# Altium PCB 400926.PcbDoc (part 6 of 7)
Units mm, origin at the board's own origin, x right, y up, seen from the top; angles counter-clockwise.
Board outline 148.5 x 63.5 mm, 4 copper layers (Top Layer, Mid-Layer 1, Mid-Layer 2, Bottom Layer), stack 1.514 mm thick; 311 components, 281 nets, 1495 pads, 2232 vias.
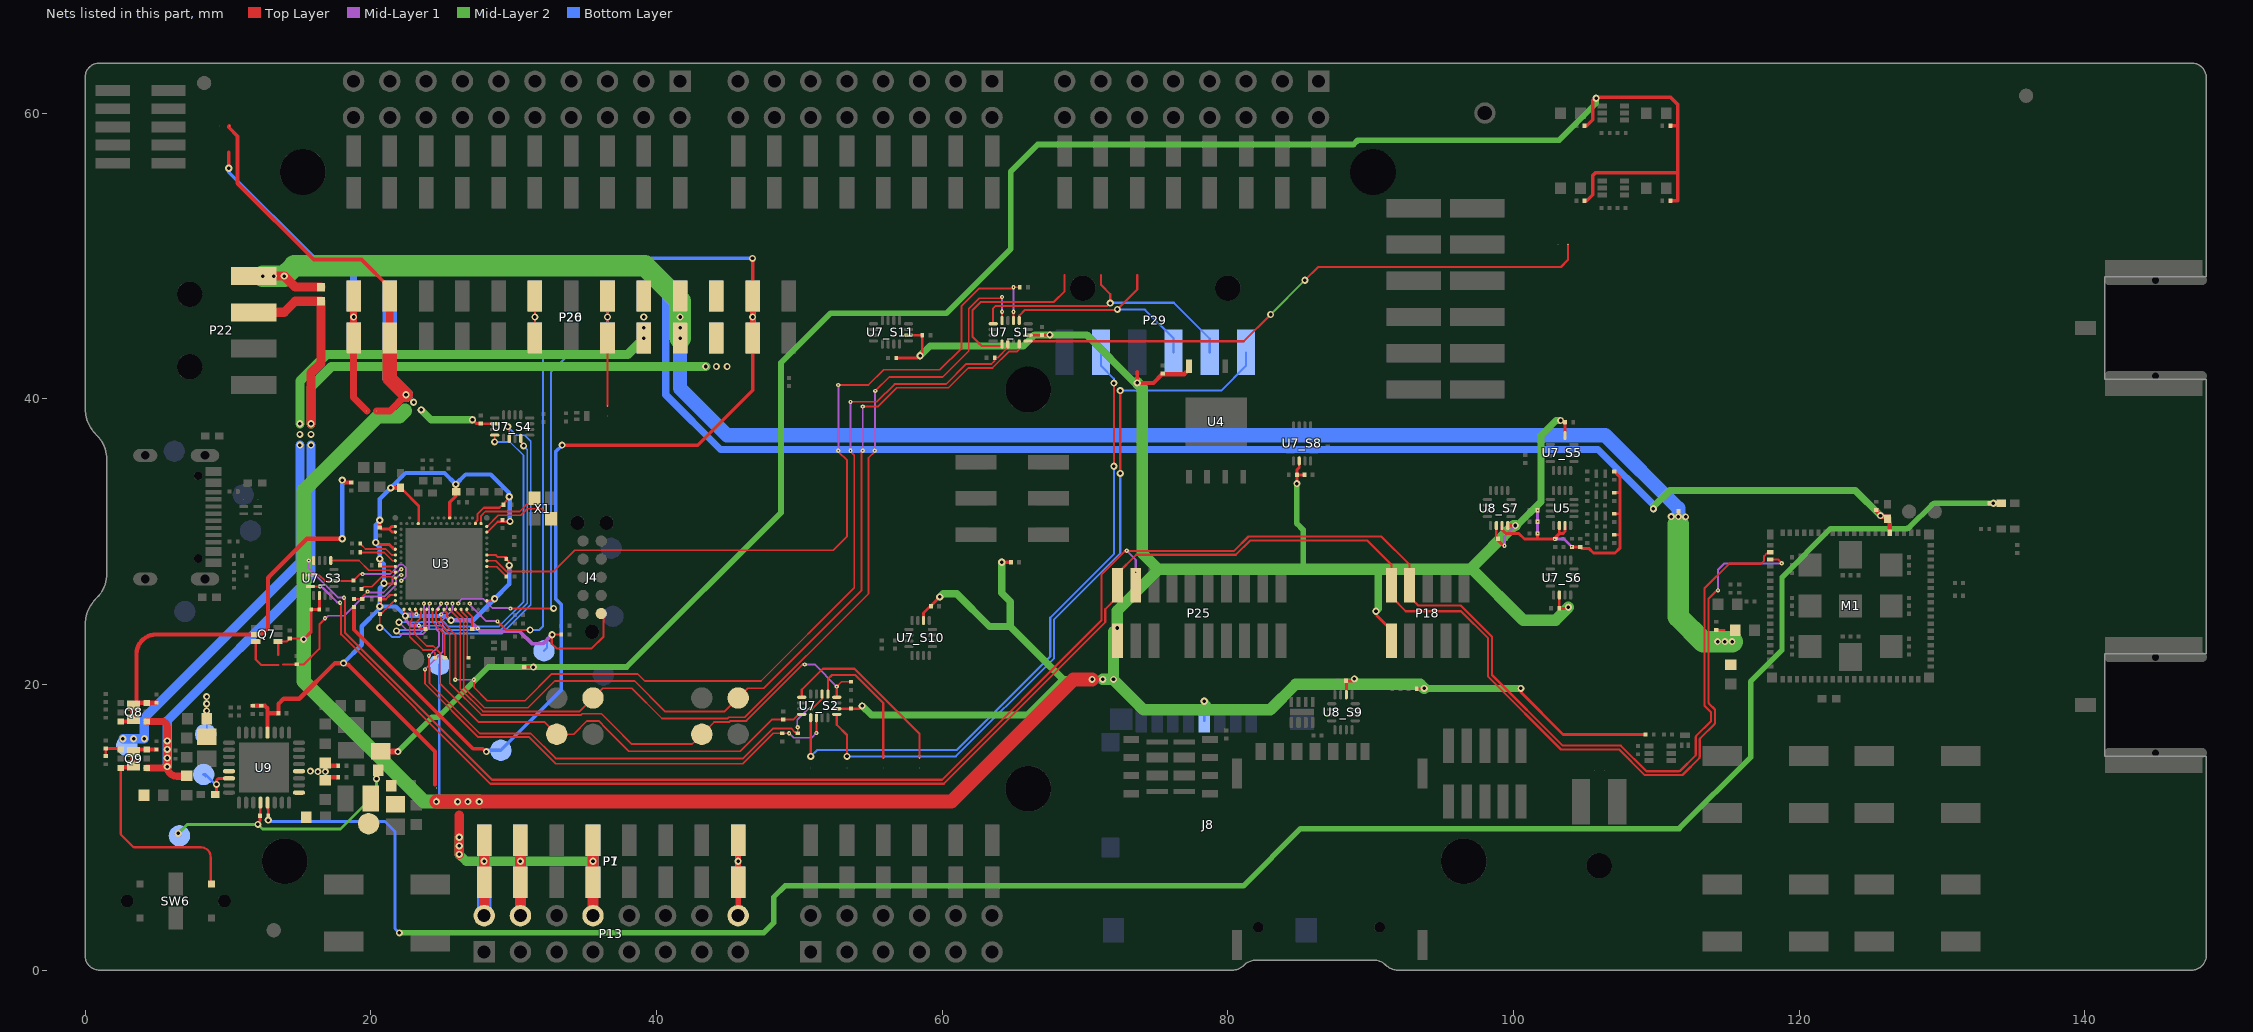
[diagram p7: the nets of this part, all layers, seen from the top]

## Via types
v1: diameter 0.5, hole 0.25, Top Layer to Bottom Layer, tented both sides, 1704 vias
v2: diameter 0.3, hole 0.1, Top Layer to Mid-Layer 1, tented top, 426 vias
v3: diameter 0.3, hole 0.1, Top Layer to Mid-Layer 1, tented both sides, 93 vias
v4: diameter 0.61, hole 0.305, Top Layer to Bottom Layer, tented both sides, 9 vias

## Nets (pads, with @x,y where several pads share a name; then routed paths per layer and width w, separated by ;. In a path a pad name is that pad's centre, name@x,y a point inside that pad or via, vN(x,y) a via of type N, cw(c..) or ccw(c..) an arc to the next point about the centre after c; other vN are vias at no path point) (continued)
SWD1_SEL: P20.8 P26.8 SB17.2 U3.AK22 | length 39.5
  Top Layer w0.15: v2(29.777,25.31) 32.786,25.31 v1(32.8,25.324) ; SB17.2@36.576,39.485 SB17.2@36.576,39.497 P20.8@36.576,44.255 v1(36.576,45.72) P20.8@36.576,47.185
  Mid-Layer 1 w0.125: v2(26.125,25.658) 26.125,25.705 26.187,25.768 26.187,25.798 26.385,25.995 27.865,25.995 28.513,25.347 29.616,25.347
  Bottom Layer w0.15: v1(32.8,25.324) 32.612,25.511 32.612,41.858 33.715,42.96 35.866,42.96 36.576,43.67 P26.8@36.576,44.255 v1(36.576,45.72) P26.8@36.576,47.185
SWD1_SWO: P20.6 P26.6 U3.AK26 | length 32.8
  Top Layer w0.15: v2(28.875,24.409) 29.476,23.808 v1@31,23.808 ; P20.6@31.496,43.612 v1(31.496,45.72) P20.6@31.496,47.185
  Mid-Layer 1 w0.125: v2(26.925,25.658) 26.925,25.581 28.06,24.446 28.715,24.446 28.718,24.442 28.842,24.442 v2(28.875,24.409)
  Bottom Layer w0.15: v1(31.159,23.808) 31.795,23.808 32.062,24.075 32.062,43.103 31.496,43.67 P26.6@31.496,44.255 v1(31.496,45.72) P26.6@31.496,47.185
SWD3_CLK: R20.1 U3.R1 | length 2.7
  Top Layer w0.125: R20.1@19.26,29.258 19.26,29.243 19.27,29.233 20.946,29.233 21.521,28.658 U3.R1@21.725,28.658
SWD3_IO: R19.1 U3.N1 | length 2.8
  Top Layer w0.125: R19.1@19.26,29.858 19.26,29.843 19.333,29.77 19.348,29.77 19.635,29.483 21.05,29.483 21.475,29.058 U3.N1@21.725,29.058
SWD3_RESET: R22.1 U3.AA1 | length 2.8
  Top Layer w0.125: R22.1@19.36,26.683 19.514,26.836 20.056,26.836 20.758,27.539 21.444,27.539 21.525,27.458 U3.AA1@21.725,27.458
SWD3_SWO: U3.W1 U7_S3.5 | length 4.9
  Top Layer w0.125: U7_S3.5@17.2,28.674 19.174,28.674 19.852,27.996 21.341,27.996 21.479,27.858 U3.W1@21.725,27.858
SWD_CTRL: R24.2 U3.AB2 U7_S3.2 U7_S3.10 | length 8.5
  Top Layer w0.125: U7_S3.10@15.775,27.649 16.4,27.649 16.8,27.249 U7_S3.2@17.425,27.249 18.765,27.249 19.24,27.724 v2(19.425,27.724)
  Mid-Layer 1 w0.125: v2(19.425,27.724) 21.349,27.724 21.996,28.37 22.254,28.37 22.45,28.175 22.45,27.541 22.167,27.258 v2(22.125,27.258)
SWDCLK: M1.3 P18.4 P25.4 U7_S3.8 | length 144.5
  Top Layer w0.15: v2(15.65,28.674) U7_S3.8@16,28.674 ; v2(18.125,26.074) 18.154,26.045 18.154,25.915 18.2,25.869 18.2,23.614 28.49,13.324 60,13.324 71.15,24.474 71.15,27.677 72.792,29.319 72.898,29.319 v2(72.927,29.347) 80.446,29.347 81.45,30.352 90.752,30.352 92.73,28.374 P18.4@92.73,26.949 92.73,26.129 93.335,25.524 96.317,25.524 98.5,23.341 98.5,20.661 103.447,15.714 107.524,15.714 109.314,13.924 111.588,13.924 ccw(c111.588,14.074) 111.694,13.968 112.721,14.995 ccw(c112.615,15.101) 112.765,15.101 112.765,16.302 cw(c112.915,16.302) 112.809,16.407 113.797,17.396 ccw(c113.69,17.502) 113.84,17.502 113.84,17.971 ccw(c113.69,17.971) 113.797,18.077 113.419,18.455 cw(c113.525,18.561) 113.375,18.561 113.375,26.725 115.099,28.449 117.333,28.449 117.55,28.667 117.55,28.819 117.55,28.982 117.742,29.174 117.9,29.174 M1.3@117.975,29.249
  Mid-Layer 1 w0.15: v2(15.65,28.674) 15.65,28.144 17.72,26.074 v2(18.125,26.074) ; v2(72.927,29.347) 73.555,28.719 v2(73.555,27.849)
SWDIO: M1.4 P18.2 P25.2 U7_S3.12 | length 142.7
  Top Layer w0.15: U7_S3.12@15.775,26.849 v2@16.375,26.849 ; v2(16.45,26.849) v2@16.375,26.849 ; v2@16.45,26.924 v2@16.375,26.849 ; v2(17.85,25.724) 17.85,25.683 17.925,25.608 17.925,23.501 28.377,13.049 60.114,13.049 71.425,24.36 71.425,25.269 72.285,26.129 P25.2@72.285,26.949 72.285,27.769 73.588,29.072 80.559,29.072 81.564,30.077 89.757,30.077 91.46,28.374 P18.2@91.46,26.949 91.46,26.129 92.465,25.124 96.328,25.124 98.225,23.227 98.225,20.547 103.333,15.439 107.41,15.439 109.2,13.649 111.763,13.649 ccw(c111.763,13.799) 111.869,13.693 112.996,14.82 ccw(c112.89,14.926) 113.04,14.926 113.04,14.994 113.04,16.127 cw(c113.19,16.127) 113.084,16.232 114.072,17.221 ccw(c113.965,17.327) 114.115,17.327 114.115,18.171 ccw(c113.965,18.171) 114.072,18.277 ; 114.072,18.277 113.694,18.655 cw(c113.8,18.761) 113.65,18.761 113.65,25.982 114.217,26.549 114.292,26.549 v3(114.321,26.578) ; M1.4@117.975,28.749 118.528,28.749 v3(118.786,28.49)
  Mid-Layer 1 w0.15: v2(16.45,26.849) 16.556,26.849 17.656,25.749 17.825,25.749 v2(17.85,25.724) ; v3(114.321,26.578) 114.321,28.02 114.763,28.462 118.758,28.462 v3(118.786,28.49)
TGT_SCL: U3.AK12 U7_S4.4 | length 26.2
  Top Layer w0.125: U7_S4.4@30.5,37.224 30.5,36.983 30.7,36.783 v1(30.7,36.699)
  Mid-Layer 1 w0.125: v1(21.8,23.749) 22.012,23.536 23.665,23.536 24.075,23.946 24.075,25.608 v2(24.125,25.658)
  Bottom Layer w0.125: v1(21.8,23.749) 21.857,23.806 23.311,23.806 23.617,24.111 25.034,24.111 25.34,23.806 29.078,23.806 30.95,25.678 30.95,36.438 30.7,36.688 v1(30.7,36.699)
TGT_SDA: U3.AK10 U7_S4.16 | length 26.5
  Top Layer w0.125: v1(28.675,36.974) U7_S4.16@28.675,37.449
  Mid-Layer 1 w0.125: v1(21.975,24.349) 22.537,23.786 23.541,23.786 23.725,23.97 v2(23.725,25.658)
  Bottom Layer w0.125: v1(21.975,24.349) 23.501,24.349 23.514,24.361 25.138,24.361 25.444,24.056 28.974,24.056 30.7,25.781 30.7,36.024 29.75,36.974 v1(28.675,36.974)
TGT_TWI_CTRL: R31.1 U3.AJ1 U7_S4.2 | length 28.8
  Top Layer w0.125: v1(20.625,23.974) 20.635,23.984 20.635,24.849 21.062,25.277 21.643,25.858 U3.AJ1@21.725,25.858 ; v1(29.6,38.049) 29.7,37.949 U7_S4.2@29.7,37.224
  Bottom Layer w0.125: v1(20.625,23.974) 20.836,23.974 21.498,23.311 21.981,23.311 22.225,23.556 23.415,23.556 23.721,23.861 24.931,23.861 25.237,23.556 29.182,23.556 31.2,25.574 31.2,37.024 30.775,37.449 30.2,37.449 v1(29.6,38.049)
UART1.CTS: P29.6 SB6.2 U7_S2.13 | length 51.7
  Top Layer w0.15: U7_S2.13@52.625,17.899 52.625,17.169 53.34,16.454 v1(53.34,14.961) ; v1(72.475,34.774) v1(72.475,40.565)
  Bottom Layer w0.15: v1(53.34,14.961) 60.967,14.961 67.842,21.836 67.842,24.553 72.475,29.185 v1(72.475,34.774) ; v1(72.475,40.565) 79.541,40.565 81.28,42.304 P29.6@81.28,43.249
UART1.RTS: P29.2 SB5.2 U7_S2.9 | length 46.2
  Top Layer w0.15: SB5.2@50.8,14.837 SB5.2@50.8,14.849 v1(50.8,14.961) U7_S2.9@50.8,17.674 U7_S2.9@50.8,17.874 ; v1(72.025,35.274) v1(72.025,41.099)
  Bottom Layer w0.15: v1(50.8,14.961) 51.25,15.411 61.028,15.411 67.567,21.95 67.567,24.666 72.025,29.124 v1(72.025,35.274) ; P29.2@71.12,43.249 71.12,42.304 72.025,41.399 v1(72.025,41.099)
UART1.RXD: P29.4 SB3.2 U7_S1.1 | length 16.1
  Top Layer w0.15: U7_S1.1@65.4,45.474 65.4,45.817 65.807,46.224 72.24,46.224 v1(72.268,46.252) 73.66,47.644 SB3.2@73.66,48.649 SB3.2@73.66,48.661
  Bottom Layer w0.15: v1(72.268,46.252) 74.172,46.252 74.221,46.203
  Bottom Layer w0.152: 74.221,46.203 76.2,44.224 P29.4@76.2,43.249
UART1.TXD: P29.5 SB4.2 U7_S1.5 | length 20.6
  Top Layer w0.15: U7_S1.5@63.575,45.249 63.575,46.324 63.75,46.499 71.575,46.499 v1(71.775,46.699) 71.775,47.324 71.12,47.979 SB4.2@71.12,48.661
  Bottom Layer w0.15: v1(71.775,46.699) 71.8,46.724 76.225,46.724 78.74,44.209 P29.5@78.74,43.249
UART2.CTS: SB10.2 U7_S2.5 | length 13
  Top Layer w0.15: U7_S2.5@50.175,19.099 50.175,19.622 51.652,21.099 53.864,21.099 58.42,16.543 SB10.2@58.42,14.849 SB10.2@58.42,14.837
UART2.RTS: SB9.2 U7_S2.1 | length 9.7
  Top Layer w0.15: U7_S2.1@52,19.324 52,20.374 52.287,20.661 53.912,20.661 55.88,18.694 SB9.2@55.88,14.849 SB9.2@55.88,14.837
UART2.RXD: SB7.2 U7_S1.9 | length 12.4
  Top Layer w0.15: U7_S1.9@64.2,43.824 64.2,43.739 64.162,43.701 62.755,43.701 62.55,43.906 62.55,43.913 62.125,44.338 62.125,46.193 62.706,46.774 67.825,46.774 68.58,47.529 SB7.2@68.58,48.649 SB7.2@68.58,48.661
UART2.TXD: SB8.2 U7_S1.13 | length 41.2
  Top Layer w0.15: U7_S1.13@66.025,44.049 66.05,44.024 81.125,44.024 v1(83,45.899) ; v1(85.4,48.299) 86.325,49.224 103.325,49.224 103.81,49.709 SB8.2@103.81,50.8
  Mid-Layer 2 w0.15: v1(83,45.899) v1(85.4,48.299)
USB_DETECT: Q7.3 R74.2 SB29.2 U3.Y2 | length 15.1
  Top Layer w0.15: Q7.3@11.95,22.999 11.95,21.749 12.35,21.349 SB29.2@13.525,21.349 ; 13.878,21.387 R74.2@14.825,21.387 ; R74.2@14.825,21.414 14.84,21.399 15.3,21.399 16.4,22.499 16.4,24.199 16.796,24.595 v2(16.796,24.636)
  Mid-Layer 1 w0.125: v2(16.796,24.636) 16.837,24.636 17.012,24.811 18.157,24.811 19.507,26.161 20.972,26.161 21.775,26.965 21.775,27.432 22.001,27.658 v2(22.125,27.658)
VBUS: Q7.2 Q8.3 Q8.6 R21.1 R78.2 | length 32
  Top Layer w0.3: Q8.3@2.495,17.399 3.225,17.399 ccw(c3.225,17.574) Q8.3@3.4,17.574 ; Q8.6@3.4,18.524 3.59,18.714 Q8.6@4.305,18.714 ; Q8.6@3.6,18.524 3.6,22.132 cw(c4.967,22.132) 4.967,23.499 Q7.2@11.95,23.499 11.975,23.524 12.364,23.524 12.8,23.96 12.8,27.332 cw(c13.1,27.332) 12.888,27.544 15.542,30.199 v1(18,30.199) ; Q8.6@4.305,18.699 Q8.6@4.305,18.714 ; R78.2@5,18.714 Q8.6@4.305,18.714 ; v1(18,34.299) 18.165,34.134 R21.1@18.625,34.134
  Top Layer w0.5: Q8.3@3.4,17.574 Q8.6@3.4,18.524
  Bottom Layer w0.3: v1(18,30.199) v1(18,34.299)
VBUSOUT: C64.2 TP25.1 U9.22 | length 3.3
  Top Layer w0.2: C64.2@9.1,12.299 ccw(c9.1,12.399) 9.2,12.399 v1(9.2,12.999) 9.2,13.199 cw(c9.425,13.199) 9.425,13.424 U9.22@10.075,13.424
  Bottom Layer w0.15: TP25.1@8.3,13.699 TP25.1@8.425,13.574
  Bottom Layer w0.2: TP25.1@8.3,13.699 8.419,13.699 9.119,12.999 v1(9.2,12.999)
VCOM0_CTRL: R13.1 U3.R31 U7_S1.2 | length 57
  Top Layer w0.125: U3.R31@28.125,28.658 28.754,28.658 29.516,27.895 32.771,27.895 34.275,29.399 52.375,29.399 53.35,30.374 53.35,35.684 52.737,36.297 v2(52.737,36.349) ; v2(52.737,40.961) 54.841,40.961 55.904,42.024 59.839,42.024 61.362,43.547 61.362,46.508 62.566,47.711 64.912,47.711 v2(65,47.799) R13.1@65.44,47.799 ; U7_S1.2@65,45.474 v2(65,46.099)
  Mid-Layer 1 w0.125: v2(52.737,36.349) v2(52.737,40.961) ; v2(65,46.099) v2(65,47.799)
VCOM0_CTS: R86.1 TP5.1 U3.AL9 U7_S2.8 | length 35.9
  Top Layer w0.125: U3.AL9@23.525,25.258 23.525,24.716 23.062,24.253 23.062,23.547 23.923,22.686 24.366,22.686 24.838,22.215 24.838,20.071 27.547,17.361 32.167,17.361 32.822,16.707 32.822,16.311 TP5.1@33.02,16.509 34.201,16.509 35.139,17.446 35.948,17.446 36.497,16.897 36.497,16.894 38.07,15.321 45.858,15.321 48.076,17.539 R86.1@48.875,17.539 49.59,17.539 49.95,17.899 U7_S2.8@50.175,17.899
VCOM0_HWFC: R18.2 U3.AK20 U7_S2.10 | length 38.4
  Top Layer w0.125: v2(23.8,21.049) 23.8,20.048 27.537,16.311 31.095,16.311 32.957,14.449 46.046,14.449 48.181,16.584 v2(49.285,16.584) ; v2(51.2,16.599) U7_S2.10@51.2,17.674
  Mid-Layer 1 w0.125: v2(23.8,21.049) 25.037,22.286 25.037,24.534 25.725,25.222 v2(25.725,25.658) ; v2(49.285,16.584) 49.607,16.261 50.862,16.261 v2(51.2,16.599)
VCOM0_RTS: R15.1 U3.AL5 | length 4.6
  Top Layer w0.125: U3.AL5@22.725,25.258 22.725,25.234 22.862,25.096 22.862,24.486 22.725,24.349 22.725,23.35 23.663,22.411 24.287,22.411 24.5,22.199 R15.1@24.5,21.868
VCOM0_RXD: TP4.1 U3.AL19 U7_S1.4 | length 69.7
  Top Layer w0.125: U3.AL19@25.525,25.216 25.542,25.216 26.262,24.496 26.262,20.464 26.262,20.184 26.262,19.707 27.858,18.111 34.622,18.111 TP4.1@35.56,19.049 36.247,19.736 38.262,19.736 40.387,17.611 44.991,17.611 45.076,17.696 46.194,17.696 54.85,26.353 54.85,35.859 55.287,36.297 v2(55.287,36.349) ; v2(55.325,40.549) 56.3,41.524 60.046,41.524 61.862,43.34 61.862,46.301 62.598,47.036 64.087,47.036 v2@64.175,47.124 ; U7_S1.4@64.2,45.474 v2(64.2,46.099)
  Top Layer w0.15: U3.AL19@25.525,25.216 U3.AL19@25.525,25.258
  Mid-Layer 1 w0.125: v2(55.287,36.349) 55.306,36.368 55.306,40.53 v2(55.325,40.549) ; v2@64.175,47.124 64.2,47.099 v2(64.2,46.099)
  other v2: 64.2,47.124
VCOM0_TXD: R11.1 U3.U31 | length 1.7
  Top Layer w0.125: U3.U31@28.125,28.258 28.144,28.239 28.819,28.239 R11.1@29.5,27.558
VCOM1_CTRL: R14.2 U3.AK18 U7_S1.10 | length 64.5
  Top Layer w0.125: v2@24.925,24.924 v2(24.925,24.899) 24.925,24.474 25.925,23.474 v2(25.925,20.324) ; v2(27.225,20.324) 27.225,19.805 28.169,18.861 30.8,18.861 32.675,20.736 38.677,20.736 39.177,20.236 47.32,20.236 53.85,26.767 53.85,36.034 53.587,36.297 v2(53.587,36.349) ; v2@53.587,39.749 53.625,39.786 55.437,39.786 56.675,41.024 60.275,41.024 61.687,42.436 63.459,42.436 63.661,42.638 63.661,42.85 R14.2@63.685,42.874 63.886,42.874 64.6,43.588 U7_S1.10@64.6,43.824
  Mid-Layer 1 w0.125: v2@24.925,24.924 25.325,25.324 v2(25.325,25.658) ; v2(25.925,20.324) v2(27.225,20.324) ; v2(53.587,36.349) v2(53.587,39.774)
VCOM1_CTS: R85.1 TP9.1 U3.AL15 U7_S2.16 | length 39.4
  Top Layer w0.125: U3.AL15@24.725,25.258 24.725,25.234 24.575,25.084 24.575,24.47 25.537,23.508 25.537,20.078 27.754,17.861 34.726,17.861 34.811,17.946 36.152,17.946 36.155,17.946 36.997,17.104 36.997,17.101 38.277,15.821 42.492,15.821 TP9.1@43.18,16.509 44.032,17.361 45.095,17.361 45.18,17.446 46.297,17.446 50.25,21.399 v2(50.375,21.399) ; v2(52.625,19.849) 52.96,20.184 R85.1@53.625,20.184
  Top Layer w0.15: U7_S2.16@52.625,19.099 v2(52.625,19.849)
  Mid-Layer 1 w0.125: v2(50.375,21.399) 51.075,21.399 v2(52.625,19.849)
VCOM1_HWFC: R17.1 U3.AK16 U7_S2.2 | length 38.7
  Top Layer w0.125: v2(24.075,22.003) 24.075,21.216 24.112,21.178 24.112,20.089 27.64,16.561 31.198,16.561 32.938,14.821 46.065,14.821 48.165,16.921 49.425,16.921 49.69,16.656 49.827,16.656 R17.1@49.9,16.584 v2(49.9,16.999) ; v2(50.8,18.299) 50.9,18.299 51.6,18.999 U7_S2.2@51.6,19.324
  Mid-Layer 1 w0.125: v2(24.075,22.003) 24.787,22.715 24.787,23.657 24.587,23.857 24.587,25.236 24.853,25.502 24.853,25.539 24.925,25.611 v2(24.925,25.658) ; v2(49.9,16.999) 49.862,17.036 49.862,17.539 50.623,18.299 v2(50.8,18.299)
VCOM1_RTS: R16.1 U3.AL13 | length 3.7
  Top Layer w0.125: U3.AL13@24.325,25.258 24.325,24.367 25.175,23.517 R16.1@25.175,21.868
VCOM1_RXD: TP8.1 U3.AL21 U7_S1.12 | length 65.2
  Top Layer w0.125: U3.AL21@25.925,25.234 25.925,25.187 25.976,25.137 ; 25.976,25.136 26.512,24.599 26.512,20.567 26.512,20.081 26.512,19.81 27.961,18.361 31.007,18.361 32.882,20.236 38.47,20.236 40.595,18.111 44.782,18.111 TP8.1@45.72,19.049 46.407,19.736 47.527,19.736 54.35,26.56 54.35,36.261 v2(54.437,36.349) ; v2(54.437,39.449) 55.5,39.449 56.825,40.774 60.45,40.774 61.825,42.149 63.525,42.149 64.687,43.311 65.257,43.311 65.4,43.454 U7_S1.12@65.4,43.824
  Mid-Layer 1 w0.125: v2(54.437,36.349) v2(54.437,39.449)
VCOM1_TXD: R12.1 U3.AL23 | length 3.6
  Top Layer w0.125: U3.AL23@26.325,25.258 26.344,25.239 26.344,25.121 26.762,24.703 26.762,21.931 R12.1@26.825,21.868
VDD: C42.2 C52_S1.1 C52_S2.1 C52_S3.1 C52_S4.1 C52_S5.1 C52_S6.1 C52_S8.1 C52_S10.1 C52_S11.1 C53_S7.1 C53_S9.1 J8.4 P18.1 P20.2 P25.1 P26.2 Q7.4 R8.1 R23.2 R35.2 R62.1 R66.1 R69.2 R75.1 SB16.2 SB20.1 SB29.1 SB30.2 SB31.1 SB32.1 SB33.2 TP23.1 U4.8 U7_S1.14 U7_S2.14 U7_S3.14 U7_S4.14 U7_S5.14 U7_S6.14 U7_S8.14 U7_S10.14 U7_S11.14 U8_S7.14 U8_S7.16 U8_S9.14 | length 344.9
  Top Layer w0.15: SB29.1@13.525,22.049 13.525,22.974 Q7.4@13.5,22.999 14.11,22.999 R75.1@14.325,23.214 15.235,23.214 v1(15.3,23.149)
  Top Layer w0.2: v1(15.3,23.149) 15.835,23.684 C52_S3.1@15.835,25.249 16.335,25.249 16.4,25.314 U7_S3.14@16.4,26.224 ; v1(27.125,38.524) 27.385,38.264 C52_S4.1@27.7,38.264 27.715,38.249 U7_S4.14@28.675,38.249 ; U7_S2.14@52.625,18.299 54.2,18.299 v1(54.4,18.499) ; R66.1@56.785,42.849 58.3,42.849 v1(58.457,43.006) 58.615,43.164 C52_S11.1@58.615,44.449 U7_S11.14@57.643,44.449 ; U7_S10.14@58.7,24.474 58.7,24.992 v1(59.832,26.124) ; U7_S1.14@66.025,44.449 66.985,44.449 C52_S1.1@67,44.464 67.54,44.464 v1(67.55,44.474) ; v1(84.838,34.061) C52_S8.1@84.838,34.67 ; U7_S8.14@85,35.649 85,35.192 84.838,35.03 C52_S8.1@84.838,34.67 ; R35.2@85.368,34.67 C52_S8.1@84.838,34.67 ; U8_S9.14@88.3,19.274 88.3,20.234 v1@88.86,20.234 ; v1(90.375,25.124) 90.432,25.067 90.432,24.817 91.46,23.789 P18.1@91.46,23.049 ; R62.1@93.235,19.699 v1@93.752,19.699 ; U8_S7.14@98.8,31.124 98.8,30.224 99.325,29.699 v2(99.375,29.699) v2@99.4,29.699 ; v1(100.525,19.717) 100.525,19.449 103.475,16.499 R8.1@109.255,16.499 ; U7_S6.14@103.21,26.258 103.208,26.256 C52_S6.1@103.208,25.333 103.217,25.324 103.775,25.324 v1(103.85,25.399)
  Top Layer w0.22: v1(103.3,38.474) 103.376,38.474 103.452,38.398 103.588,38.398 103.61,38.376 U7_S5.14@103.61,37.433
  Top Layer w0.25: v1(73.66,41.109) SB20.1@73.66,41.854 73.66,41.892
  Top Layer w0.254: SB16.2@10.1,59.094 10.062,59.056 10.062,58.999 10.675,58.386 10.675,55.074 16,49.749 19.35,49.749 21.336,47.763 P20.2@21.336,46.948 ; v1(64.176,28.549) R69.2@64.815,28.549 ; U8_S7.16@99.6,31.124 v1(100.137,31.124)
  Top Layer w0.3: v1(73.66,41.109) 74.795,41.109 75.41,41.724 76.95,41.724 77.282,42.056 U4.8@77.282,42.269
  Top Layer w0.5: 20.404,39.147 21.337,39.147 v1(22.47,40.279)
  Top Layer w0.508: P20.2@21.336,44.255 P20.2@21.336,46.948
  Top Layer w1: P20.2@21.336,44.255 21.336,41.413 v1(22.47,40.279) ; v1@24.6,11.799 25.3,11.799 26.078,11.799 60.65,11.799 69.2,20.349 v1(70.5,20.349)
  Mid-Layer 1 w0.2: v2(99.375,29.699) 99.375,30.362 v1(100.137,31.124)
  Mid-Layer 2 w0.4: v1(84.838,34.061) 84.838,31.264 85.282,30.82 85.282,28.049
  Mid-Layer 2 w0.5: v1(23.53,39.219) 24.225,38.524 v1(27.125,38.524) ; v1(54.4,18.499) 55.05,17.849 65.975,17.849 68.475,20.349 ; v1(58.457,43.006) 59.15,43.699 65.7,43.699 66.475,44.474 v1(67.55,44.474) 70.125,44.474 73.49,41.109 v1(73.66,41.109) ; v1(59.832,26.124) 60.057,26.349 61.025,26.349 63.325,24.049 64.775,24.049 ; v1(64.176,28.549) 64.176,26.398 64.775,25.799 64.775,24.049 ; v1(70.5,20.349) 68.475,20.349 ; v1(78.35,18.824) 78.58,18.594 78.58,18.224 ; v1(88.86,20.384) 89.13,20.114 89.13,19.999 ; v1(90.375,25.124) 90.53,25.279 90.53,28.049 ; v1(93.752,19.717) v1(100.525,19.717) ; v1(100.137,31.124) 100.259,31.124 101.925,32.79 101.925,37.43 102.969,38.474 v1(103.3,38.474) ; 64.775,24.049 68.475,20.349
  Mid-Layer 2 w0.8: v1(71.25,20.349) 71.975,20.349 74.1,18.224 78.58,18.224 82.968,18.224 84.743,19.999 89.13,19.999 93.47,19.999 v1(93.752,19.717) ; v1(72,20.349) 72,23.674 v1(72.275,23.949) 72.275,25.169 75.155,28.049 ; v1(73.66,41.109) 74,40.769 74,29.204 75.155,28.049 ; v1(100.137,31.124) 100.025,31.124 96.95,28.049 ; v1(103.85,25.399) 102.95,24.499 100.693,24.499 97.143,28.049 96.95,28.049 ; 75.155,28.049 85.282,28.049 90.53,28.049 96.95,28.049
  Mid-Layer 2 w1: 22.4,39.149 22,38.749 20.5,38.749 15.3,33.549 15.3,20.227 23.728,11.799 v1(26.8,11.799) v1(27.6,11.799)
  Bottom Layer w0.2: v1(24.595,11.798) 24.595,11.864 24.795,12.065 TP23.1@24.795,21.379 ; J8.4@78.35,17.469 v1(78.35,18.824)
  Bottom Layer w1: P26.2@21.336,47.185 P26.2@21.336,44.255 21.336,41.413 v1(22.47,40.279)
  other v1: 26.078,11.784 23,39.749
VDD_1V8: C60.2 C69.2 FB5.1 L7.1 TP21.1 U9.1
VDD_3V0: C72.2 FB6.2 R33.2 R39.2 R40.2 R41.2 R42.2 R87.1 TP27.1 U9.28 | length 156.1
  Top Layer w0.2: v1(12.1,10.199) 12.1,10.28 12.257,10.437 12.257,10.749 12.252,10.754 R87.1@12.252,10.799 12.264,10.811 12.264,11.713 U9.28@12.275,11.724 ; R33.2@30.75,21.214 v1(31.39,21.214)
  Top Layer w0.25: R41.2@104.983,53.867 105.143,53.867 105.556,54.28 105.556,55.631 105.747,55.822 111.496,55.822 ; R39.2@104.983,59.117 105.143,59.117 105.556,59.53 105.556,60.881 ; v1(105.79,61.032) 105.856,61.099 111,61.099 111.499,60.6 111.499,53.867 R42.2@110.983,53.867 ; R40.2@110.983,59.117 111.499,59.117
  Top Layer w0.4: FB6.2@20.7,15.324 20.725,15.299 v1(21.9,15.299)
  Mid-Layer 2 w0.2: v1(6.525,9.574) 7.15,10.199 v1(12.1,10.199) 12.429,9.87 17.871,9.87 20.4,12.399 v1(20.4,13.399)
  Mid-Layer 2 w0.4: v1(21.9,15.299) 24.293,17.692 24.707,17.692 28.228,21.214 v1(31.39,21.214) 37.915,21.214 48.714,32.013 48.714,42.513 52.189,45.988 60.311,45.988 64.8,50.478 64.8,55.899 66.7,57.799 88.8,57.799 89.1,58.099 103.2,58.099 105.8,60.699 105.8,60.999 105.79,61.009 v1(105.79,61.032)
VDD_5V: C54.2 C58.2 P20.11 P22.2 P26.11 Q8.4 Q9.4 R82.2 SB34.2 SB35.1 U9.21 | length 79
  Top Layer w0.5: Q9.4@4.305,14.149 5.65,14.149 v1(5.75,14.249) ; Q8.4@4.305,17.399 5.4,17.399 cw(c5.4,17.049) 5.75,17.049 v1(5.75,16.049) v1(5.75,15.449) v1(5.75,14.849) v1(5.75,14.249) ; C54.2@7.127,13.596 cw(c7.105,13.596) 7.105,13.574 6.425,13.574 cw(c6.425,14.249) v1(5.75,14.249)
  Top Layer w0.65: P22.2@11.811,46.048 13.946,46.048 14.716,46.818 R82.2@16.51,46.818 16.51,42.49 15.819,41.799 v1(15.819,38.249)
  Mid-Layer 2 w0.65: v1(15.819,38.249) 15.819,40.818 17.256,42.255 v1(43.446,42.255)
  Bottom Layer w0.65: v1(5.75,14.249) v1(5.75,14.849) v1(5.75,15.449) v1(5.75,16.049) 5.75,17.449 15.819,27.518 v1(15.819,36.749)
  other v1: 15.819,37.499 44.196,42.255 44.946,42.255
VDD_GNSS: C11.2 L3.1 R87.2 U9.29 | length 148.8
  Top Layer w0.2: U9.29@12.775,11.724 12.775,11.422 12.794,11.403 12.794,11.282 12.827,11.249 12.827,10.849 12.822,10.845 12.828,10.838 v1(12.828,10.503)
  Mid-Layer 2 w0.381: v1@22.032,2.599 47.5,2.599 48.2,3.299 48.2,5.099 49,5.899 81.1,5.899 85.1,9.899 111.6,9.899 116.6,14.899 116.6,20.199 118.8,22.399 118.8,27.499 122.2,30.899 127.467,30.899 ccw(c127.467,31.28) 127.736,31.01 129.299,32.573 cw(c129.568,32.303) 129.568,32.684 v1(133.606,32.684)
  Bottom Layer w0.2: v1(12.828,10.503) 12.831,10.499 ccw(c13.004,10.599) 13.004,10.399 21,10.399 21.7,9.699 21.7,2.899 v1(22,2.599)
VDD_GPIO: C4.1 C5.1 M1.65 P20.1 P26.1 SB31.2 | length 135.5
  Top Layer w0.305: C4.1@125.4,32.184 125.602,31.982 125.602,31.969 125.7,31.871 v1(125.7,31.818) ; v1@125.691,31.799 125.753,31.799 125.805,31.747 126.202,31.747 126.3,31.649 126.3,31.399 126.35,31.349 M1.65@126.35,30.624
  Top Layer w0.5: 18.796,41.889 18.796,40.079 SB31.2@19.728,39.147
  Top Layer w0.508: 18.796,41.889 P20.1@18.796,44.255 P20.1@18.796,47.185
  Mid-Layer 2 w0.5: v1(109.8,32.299) 109.8,32.449 110.937,33.586 123.933,33.586 v1(125.7,31.818)
  Bottom Layer w0.5: P26.1@18.796,47.185 18.796,48.82 19.3,49.324 39.575,49.324 40.65,48.249 40.65,40.274 44.479,36.445 105.929,36.445 109.8,32.574 v1(109.8,32.299)
  Bottom Layer w0.508: P26.1@18.796,44.255 P26.1@18.796,47.185
  other v1: 18.796,45.72
VDD_IMCU: C24.2 C25.2 C26.1 C27.2 C28.1 C31.2 C32.2 C33.2 C34.1 C35.2 C62.1 J4.1 R34.2 R83.2 R84.2 SB32.2 TP12.1 U3.A19 U3.AC1 U3.AG1 U3.AJ31 U3.AL3 U3.AL7 U3.AL11 U3.AL17 U3.AL25 U3.B8 U3.B28 U3.C1 U3.E1 U3.E31 U3.L1 U3.N31 U3.U1 U9.12 | length 105.2
  Top Layer w0.15: v1@20.635,25.458 C26.1@20.635,25.958 ; C25.2@20.635,28.258 U3.U1@21.725,28.258 ; C25.2@20.635,28.333 v1@20.635,28.783 ; C26.1@20.65,25.958 21.05,25.958 21.35,26.258 U3.AG1@21.725,26.258 ; v1@20.925,27.058 U3.AC1@21.725,27.058 ; v1@22.325,24.793 U3.AL3@22.325,25.258 ; v2(23.2,24.921) U3.AL7@23.2,25.183 ; v2(23.375,24.124) 23.375,23.999 23.506,23.868 C27.2@23.827,23.868 23.837,23.879 23.837,25.15 23.925,25.238 U3.AL11@23.925,25.258 ; U3.AL17@25.125,25.216 25.34,25.001 25.34,24.778 v1(25.625,24.493) ; U3.AL25@26.725,25.258 26.725,25.112 27.1,24.737 C31.2@27.1,23.868 27.125,23.893 27.475,23.893 v2(27.5,23.918) ; U3.B28@27.325,31.258 27.325,31.333 27.462,31.47 27.462,31.915 27.918,32.37 29.012,32.37 29.141,32.499 29.23,32.499 29.261,32.53 29.261,32.619 29.7,33.058 v1(29.7,33.133) ; U3.AJ31@28.125,25.858 28.443,25.858 ; U3.N31@28.125,29.058 28.75,29.058 28.9,28.908 C32.2@29.49,28.908 ; U3.E31@28.125,30.658 28.167,30.658 28.892,31.383 v1@29.75,31.383 ; C32.2@29.427,28.845 29.634,28.639 29.634,28.399 v1(29.7,28.333) ; R34.2@33.34,23.499 32.725,23.499 v1(32.7,23.474) 32.675,23.449 32.675,22.849 33,22.524 35.467,22.524 36.3,23.357 36.3,24.794 J4.1@36.135,24.959
  Top Layer w0.187: C35.2@22.175,33.838 22.175,33.666 23.368,32.473 23.368,31.301 U3.B8@23.325,31.258
  Top Layer w0.2: v1(20.35,29.933) 20.5,29.783 21.323,29.783 21.648,29.458 U3.L1@21.725,29.458 ; C24.2@20.625,30.993 20.644,30.958 ccw(c20.809,31.07) 20.809,30.87 21.287,30.87 ; U3.E1@21.725,30.658 21.72,30.663 21.495,30.663 21.287,30.87 ; U3.C1@21.725,31.058 21.475,31.058 21.287,30.87
  Top Layer w0.225: U3.A19@25.525,31.658 25.525,32.753 25.95,33.178 v1(25.95,34.008)
  Top Layer w0.25: C24.2@20.625,30.993 20.619,30.999 20.619,31.491 v1(20.625,31.496)
  Top Layer w0.3: R84.2@11.737,18.501 11.739,18.499 12.599,18.499 12.775,18.323 12.775,17.999 ; U9.12@12.775,16.624 12.775,17.999 ; v1(18.091,21.49) 18.145,21.49 18.245,21.39 18.415,21.39 24.5,15.304 24.5,12.999 ; v1@18.109,21.49 17.491,21.49 15,18.999 13.9,18.999 13.54,18.639 C62.1@13.54,17.974 12.8,17.974 12.775,17.999 ; v1(21.4,33.758) C35.2@22.025,33.758
  Mid-Layer 1 w0.25: v1(22.423,24.793) 22.475,24.741 22.475,24.466 22.817,24.124 v2(23.375,24.124) ; v1@22.527,24.921 v2(23.2,24.921) ; v1(25.625,24.493) 26.925,24.493 v2(27.5,23.918) 27.71,23.708 30.441,23.708 31.291,22.858 32.084,22.858 v1(32.7,23.474)
  Bottom Layer w0.15: TP12.1@32.129,22.352 32.343,22.566 32.343,23.217 32.533,23.407 32.633,23.407 v1(32.7,23.474)
  Bottom Layer w0.3: v1(18.091,21.49) 19.375,22.774 19.375,24.066 20.587,25.278 20.587,25.366 v1@20.625,25.366 ; v1(29.7,28.333) 29.7,27.02 v1(28.675,25.995) 27.173,24.493 v1(25.625,24.493) 25.571,24.493 25.271,24.793 v1(22.423,24.793) 21.758,25.458 v1(20.625,25.458) 20.625,26.733 20.925,27.033 v1(20.925,27.087) 20.925,28.429 20.625,28.729 v1(20.625,28.783) 20.625,29.604 20.35,29.879 v1(20.35,29.933) 20.35,31.167 20.625,31.442 v1(20.625,31.496) 20.625,32.983 v1(21.4,33.758) 22.441,34.799 25.159,34.799 v1(25.95,34.008) 26.641,34.699 28.4,34.699 29.662,33.437 29.662,33.171 v1(29.7,33.133) 29.725,33.108 29.725,31.433 v1(29.75,31.408)
VDD_nRF: C1.1 C2.1 C3.1 FB1.1 P20.10 P22.1 P26.10 R82.1 SB34.1 | length 127.1
  Top Layer w0.125: C1.1@114.19,23.814 114.8,23.814
  Top Layer w0.65: P22.1@11.811,48.588 v1(12.446,48.588) v1(13.196,48.588) v1(13.946,48.588) 14.716,47.818 R82.1@16.51,47.818
  Mid-Layer 2 w1.5: v1(12.446,48.588) v1(13.196,48.588) v1(13.946,48.588) 14.657,49.299 39.2,49.299 41.656,46.843 v1(41.656,45.72) v1(41.656,44.97) v1(41.656,44.22) ; 111.55,31.225 111.55,24.724 113.28,22.994 v1(114.298,22.994) ; v1@114.298,22.991 115.301,22.991 v1(115.305,22.995)
  Bottom Layer w1: P26.10@41.656,44.255 v1(41.656,44.22) 41.656,40.741 44.948,37.449 106.425,37.449 111.55,32.324 v1@111.55,31.849
  other v1: 114.8,22.999 112.053,31.728 111.048,31.744 111.55,31.749
VIN: P1.8 P7.8 P13.16 | length 8.2
  Top Layer w0.381: P13.16@45.72,3.81 P1.8@45.72,6.155 v1(45.72,7.62) P1.8@45.72,9.085
  Bottom Layer w0.381: P7.8@45.72,6.155 v1(45.72,7.62) P7.8@45.72,9.085
VIN:5V: P20.9 P26.9 Q9.1 R79.2 R80.1 TP22.1 | length 56.5
  Top Layer w0.2: R79.2@1.45,14.984 R80.1@1.45,15.514 2.43,15.514 Q9.1@2.495,15.449
  Mid-Layer 2 w0.65: v1(15.044,38.249) 15.044,41.243 16.9,43.099 37.995,43.099 v1(39.116,44.22)
  Bottom Layer w0.65: v1(2.65,16.199) v1(3.4,16.199) v1(4.15,16.199) 4.15,17.649 15.044,28.543 v1(15.044,36.749)
  other v1: 15.044,37.499 39.116,44.97 39.116,45.72
VIN_5V: Q9.3 Q9.6 R81.1 SW6.6 | length 17.3
  Top Layer w0.15: Q9.3@2.495,14.149 2.495,9.566 ccw(c2.645,9.566) 2.539,9.46 3.356,8.643 ccw(c3.462,8.749) 3.462,8.599 8.1,8.599 cw(c8.1,7.899) 8.8,7.899 SW6.6@8.8,6.084
  Top Layer w0.3: Q9.3@2.495,14.149 2.547,14.201 Q9.3@3.182,14.201 ; Q9.3@3.1,14.119 Q9.3@3.182,14.201 ; Q9.3@3.4,14.324 3.305,14.324 Q9.3@3.182,14.201 ; Q9.6@3.4,15.274 3.575,15.449 Q9.6@4.305,15.449 R81.1@5,15.449 ; SW6.6@8.8,6.084 ccw(c8.85,6.084) SW6.6@8.85,6.034
  Top Layer w0.5: Q9.3@3.4,14.324 Q9.6@3.4,15.274
VIO: P1.1 P1.2 P1.4 P7.1 P7.2 P7.4 P13.2 P13.4 P13.8 SB30.1 | length 39.4
  Top Layer w0.65: SB30.1@26.195,10.848 26.2,10.848 v1(26.2,9.299) v1(26.2,8.699) v1(26.2,8.099)
  Top Layer w0.75: P13.2@27.94,3.81 P1.1@27.94,9.085 ; P13.4@30.48,3.81 P1.2@30.48,9.085 ; P13.8@35.56,3.81 v1(35.56,7.62) P1.4@35.56,9.085
  Mid-Layer 2 w0.65: v1(26.2,9.299) v1(26.2,8.699) v1(26.2,8.099) 26.679,7.62 v1(27.94,7.62) v1(30.48,7.62) v1(35.56,7.62)
  Bottom Layer w0.762: P7.1@27.94,6.155 P7.1@27.94,9.085 ; P7.2@30.48,6.155 P7.2@30.48,9.085 ; P7.4@35.56,6.155 P7.4@35.56,9.085
  Bottom Layer w1: P13.2@27.94,3.81 27.94,5.06
VIO_REF: P20.12 P26.12 R64.1 SB15.2 TP16.1 | length 107.1
  Top Layer w0.25: v1(10.062,56.137) 10.062,57.249 ; R64.1@18.825,25.414 18.825,23.838 27.164,15.499 27.832,15.499 28.032,15.299 v1(28.1,15.299) ; v1(33.4,36.749) 42.9,36.749 46.736,40.585 P20.12@46.736,44.255 ; v1@46.7,49.824 46.736,49.788 P20.12@46.736,46.99
  Top Layer w0.381: P20.12@46.736,44.255 v1(46.736,45.72) P20.12@46.736,46.99
  Bottom Layer w0.25: v1(10.062,56.137) 10.062,55.86 16.099,49.824 v1@46.7,49.824 ; v1(28.1,15.299) 28.186,15.385 TP16.1@29.108,15.385 33.35,19.626 33.35,25.574 32.937,25.986 32.937,36.286 v1(33.4,36.749) ; P26.12@46.736,47.185 P26.12@46.736,47.763
  Bottom Layer w0.381: P26.12@46.736,44.255 v1(46.736,45.72) P26.12@46.736,47.185
  other v1: 46.725,49.824
VIO_REF_SENSE: R64.2 R65.2 U3.V2 | length 4.6
  Top Layer w0.125: R64.2@18.825,25.984 R65.2@19.4,25.984 19.4,26.124 v2(19.775,26.499)
  Mid-Layer 1 w0.125: v2(19.775,26.499) 19.838,26.436 20.893,26.436 21.525,27.068 21.525,27.535 21.985,27.995 22.015,27.995 22.078,28.058 v2(22.125,28.058)
VIOEXT: C43.2 R48.2 R49.2 R50.2 R51.2 R52.2 R54.2 R56.2 R58.2 R60.2 U5.14 U5.15 U8_S7.15 | length 20.1
  Top Layer w0.2: U8_S7.15@99.2,31.124 99.204,31.12 99.204,30.831 99.461,30.574 100.375,30.574 100.775,30.174 101.725,30.174 ; v2(101.688,30.571) 101.688,30.211 101.725,30.174 ; U5.14@103.21,31.124 103.21,30.549 ; U5.15@103.61,31.124 103.61,30.695 103.492,30.577 103.238,30.577 103.21,30.549 ; 101.725,30.174 v2(102.906,30.174) C43.2@102.927,30.196 102.927,30.266 103.21,30.549
  Top Layer w0.203: v2(104.095,29.626) R51.2@104.68,29.626 104.777,29.528 105.276,29.528 105.6,29.204 107.118,29.204 107.448,29.533 107.448,31.958 ; R52.2@107.048,30.475 107.443,30.475 ; R54.2@107.048,31.948 107.438,31.948 107.448,31.958 ; R56.2@107.048,33.421 107.437,33.421 ; R60.2@107.048,34.895 107.083,34.895 107.448,34.53 107.448,31.958
  Mid-Layer 1 w0.2: v2(101.688,30.571) v2(101.688,31.384) v2(101.688,32.197)
  Mid-Layer 1 w0.203: v2(102.906,30.174) 103.547,30.174 v2(104.095,29.626)
VSYS: C55.2 C56.2 C65.2 C66.2 C68.2 FB4.2 TP26.1 U9.4 | length 3.6
  Top Layer w0.125: 17.592,13.496 C66.2@17.727,13.496 ; 17.592,14.296 C65.2@17.727,14.296
  Top Layer w0.3: C55.2@16.827,13.296 17.027,13.496 17.592,13.496 ; C56.2@16.827,14.496 17.027,14.296 17.592,14.296
  Bottom Layer w0.125: TP26.1@8.44,16.509 8.513,16.582 v1(8.513,18.144)
  other v1: 16.3,13.899 16.825,13.899 15.773,13.926 8.513,18.644 8.513,19.144
XC1: U3.C31 X1.1 | length 5.3
  Top Layer w0.125: U3.C31@28.125,31.058 28.149,31.058 28.937,31.845 30.512,31.845 30.962,32.295 31.984,32.295 32.625,31.655 X1.1@32.625,31.587
XC2: U3.B30 X1.3 | length 4.6
  Top Layer w0.125: U3.B30@27.725,31.258 27.725,31.806 28.027,32.108 30.421,32.108 30.955,32.642 31.112,32.642 X1.3@31.36,32.89
pads on no net: D5. D5.4 Fid1.0 Fid2.0 Fid3.0 J4.0 J4.6 J4.7 J4.8 J4.9 J5. J5.C6 J6. J6.0 J6.A8 J6.B8 J8.10 M1.26 M1.31 M1.32 M1.33 M1.37 M1.81 M1.82 M1.83 M1.84 M1.85 M1.86 M1.87 M1.88 M1.89 M1.90 M1.91 M1.92 M1.93 M1.94 M1.95 M1.96 M1.97 M1.98 M1.100 M1.102 M1.103 M1.104 P18.7 P18.8 P19.7 P19.8 P19.9 P22.0 P22.3 P25.11 P25.13 P28.3 P28.7 P28.8 P28.9 P28.10 P29.0 P30.0 SW6.0 U1.4 U3. U3.A1 U3.A21 U3.A31 U3.AG31 U3.AK2 U3.AK4 U3.AK6 U3.AL1 U3.AL31 U3.B10 U3.D2 U3.F2 U3.J1 U3.K2 U3.L31 U3.M2 U3.P2 U3.T2 U4.3 U4.7 U6.0 U6.4 U6.5 U8_S7.10 U8_S9.10 U9.7 U9.8 U9.9 U9.10 U9.11 U9.15 U9.18 U9.19 U9.23 U9.24 U9.25 U9.26 U9.27

## Polygon pours and split planes (outlines as drawn)
GND on Top Layer "Top_Layer-GND" (solid, pour order 36): 124.35,18.999 131.6,18.999 131.6,22.599 124.35,22.599
GND on Top Layer "Top_Layer-GND" (solid, remove dead copper, pour order 35): 0,0 0,63.5 152.5,63.5 152.5,0
VDD_nRF on Top Layer "NONET_L-01_P-001" (solid, pour order 33): 114,23.952 115.271,23.952 115.9,23.952 115.9,22.12 cw(c115.609,22.12) 115.815,21.914 115.746,21.845 ccw(c116.082,21.508) 115.606,21.508 115.606,21.004 114.803,21.004 114.8,21.61 ccw(c114.629,21.61) 114.719,21.755 114.114,22.129 cw(c114.24,22.334) 114,22.334
NetC8_2 on Top Layer "VUSB" (solid, pour order 32): 8.9,29.599 10.4,29.599 cw(c10.4,29.399) 10.6,29.399 10.6,28.699 11.6,28.699 11.6,28.099 11,28.099 11,28.299 10,28.299 cw(c10,28.399) 9.9,28.399 9.9,28.899 ccw(c9.8,28.899) 9.8,28.999 9,28.999 cw(c9,29.099) 8.9,29.099
NetC8_2 on Top Layer "VUSB" (solid, pour order 31): 9.1,34.299 11.4,34.299 11.4,33.499 11.4,32.899 11.2,32.899 11.2,33.099 11.2,33.899 9.1,33.899
VDD on Top Layer "NONET_L-01_P-001" (solid, pour order 29): 24.1,11.353 24.1,12.239 cw(c24.16,12.239) 24.16,12.299 25.1,12.299 25.1,11.299 24.154,11.299 cw(c24.154,11.353)
GND on Bottom Layer "Bottom_Layer-GND" (solid, remove dead copper, pour order 18): 0,0 0,63.5 152.25,63.5 152.25,0
GND on Mid-Layer 1 "Mid_Layer_1-GND" (solid, remove dead copper, pour order 22): 0,0 0,63.5 155,63.5 155,0
GND on Mid-Layer 2 "Mid_Layer_2-GND" (solid, remove dead copper, pour order 28): 0,0 0,63.5 155,63.5 155,0

## Keep-outs
Top Layer:
  circle w0.152: c13.97,7.62 r2.4
  circle w0.152: c15.24,55.88 r2.4
  circle w0.152: c66.04,12.7 r2.4
  circle w0.152: c66.04,40.64 r2.4
  circle w0.152: c96.52,7.62 r2.4
  region: 109.775,55.149 110.225,55.149 110.225,54.374 109.775,54.374
  region: 103.75,55.149 104.2,55.149 104.2,54.524 103.75,54.524
  region: 115.475,28.049 116.45,28.049 116.45,27.549 115.475,27.549
  region: 116.675,27.549 117.45,27.549 117.45,26.924 116.675,26.924
  lines w0.152: 90.909,53.597 cw(c90.17,55.88) 91.891,54.207
Bottom Layer:
  circle w1.3: c114.808,48.978 r0.01
  circle w1.3: c113.284,46.609 r0.01
  circle w1.3: c127.127,11.176 r0.01
  circle w1.3: c39.37,16.802 r0.01
  circle w1.3: c22.987,13.964 r0.01
  circle w1.3: c9.869,7.112 r0.01
  circle w1.3: c22.987,13.964 r0.01
  circle w1.3: c34.163,26.543 r0.01
  circle w1.3: c125.476,2.064 r0.01
  circle w1.3: c83.82,14.732 r0.01
  circle w1.3: c86.97,16.149 r0.01
  circle w1.3: c88.804,18.911 r0.01
  circle w1.3: c82.839,19.441 r0.01
  circle w1.3: c53.721,22.078 r0.01
  circle w1.3: c111.379,54.483 r0.01
  circle w0.152: c13.97,7.62 r2.4
  circle w0.152: c15.24,55.88 r2.4
  circle w0.152: c66.04,12.7 r2.4
  circle w0.152: c96.52,7.62 r2.4
  lines w0.152: 67.712,42.362 ccw(c66.04,40.64) 68.297,41.457 ; 90.849,53.578 cw(c90.17,55.88) 91.929,54.247
Keep-Out Layer:
  circle w0.152: c79.1,-0.001 r0.173
  circle w0.152: c78.3,-0.001 r0.173
  circle w0.152: c77.5,-0.001 r0.173
  circle w0.152: c76.7,-0.001 r0.173
  circle w0.152: c75.9,-0.001 r0.173
  circle w0.152: c79.1,63.499 r0.173
  circle w0.152: c78.3,63.499 r0.173
  circle w0.152: c77.5,63.499 r0.173
  circle w0.152: c76.7,63.499 r0.173
  circle w0.152: c75.9,63.499 r0.173
  circle w0.152: c141.6,63.499 r0.173
  circle w0.152: c140.8,63.499 r0.173
  circle w0.152: c140,63.499 r0.173
  circle w0.152: c139.2,63.499 r0.173
  circle w0.152: c138.4,63.499 r0.173
  circle w0.152: c141.6,-0.001 r0.173
  circle w0.152: c140.8,-0.001 r0.173
  circle w0.152: c140,-0.001 r0.173
  circle w0.152: c139.2,-0.001 r0.173
  circle w0.152: c138.4,-0.001 r0.173
  circle w0.152: c16.6,-0.001 r0.173
  circle w0.152: c15.8,-0.001 r0.173
  circle w0.152: c15,-0.001 r0.173
  circle w0.152: c14.2,-0.001 r0.173
  circle w0.152: c13.4,-0.001 r0.173
  circle w0.152: c16.6,63.499 r0.173
  circle w0.152: c15.8,63.499 r0.173
  circle w0.152: c15,63.499 r0.173
  circle w0.152: c14.2,63.499 r0.173
  circle w0.152: c13.4,63.499 r0.173
  circle w0.152: c148.5,51.899 r0.173
  circle w0.152: c148.5,52.699 r0.173
  circle w0.152: c148.5,53.499 r0.173
  circle w0.152: c148.5,54.299 r0.173
  circle w0.152: c148.5,55.099 r0.173
  circle w0.152: c148.5,8.399 r0.173
  circle w0.152: c148.5,9.199 r0.173
  circle w0.152: c148.5,9.999 r0.173
  circle w0.152: c148.5,10.799 r0.173
  circle w0.152: c148.5,11.599 r0.173
  circle w0.152: c0,8.399 r0.173
  circle w0.152: c0,9.199 r0.173
  circle w0.152: c0,9.999 r0.173
  circle w0.152: c0,10.799 r0.173
  circle w0.152: c0,11.599 r0.173
  circle w0.152: c0,51.899 r0.173
  circle w0.152: c0,52.699 r0.173
  circle w0.152: c0,53.499 r0.173
  circle w0.152: c0,54.299 r0.173
  circle w0.152: c0,55.099 r0.173

## Text inside footprints (layer, text, board x,y; h text height)
U3: Top Component Info "B30" at 27.627,31.419 h0.08; Top Component Info "C31" at 28.247,31.018 h0.08; Top Component Info "E31" at 28.247,30.618 h0.08; Top Component Info "A27" at 27.023,31.819 h0.08; Top Component Info "B28" at 27.227,31.419 h0.08; Top Component Info "A25" at 26.623,31.819 h0.08; Top Component Info "B26" at 26.827,31.419 h0.08; Top Component Info "G31" at 28.247,30.218 h0.08; Top Component Info "J31" at 28.247,29.818 h0.08; Top Component Info "L31" at 28.247,29.418 h0.08; Top Component Info "N31" at 28.247,29.018 h0.08; Top Component Info "R31" at 28.247,28.618 h0.08; Top Component Info "U31" at 28.247,28.218 h0.08; Top Component Info "A23" at 26.223,31.818 h0.08; Top Component Info "A21" at 25.823,31.818 h0.08; Top Component Info "B20" at 25.627,31.419 h0.08; Top Component Info "A19" at 25.423,31.819 h0.08; Top Component Info "A17" at 25.023,31.819 h0.08; Top Component Info "A15" at 24.623,31.819 h0.08; Top Component Info "B18" at 25.227,31.419 h0.08; Top Component Info "B14" at 24.427,31.419 h0.08; Top Component Info "B24" at 26.427,31.419 h0.08; Top Component Info "B22" at 26.027,31.419 h0.08; Top Component Info "B16" at 24.827,31.419 h0.08; Top Component Info "W31" at 28.247,27.818 h0.08; Top Component Info "AA31" at 28.247,27.418 h0.08; Top Component Info "AC31" at 28.247,27.018 h0.08; Top Component Info "AE31" at 28.247,26.618 h0.08; Top Component Info "AG31" at 28.247,26.218 h0.08; Top Component Info "AJ31" at 28.247,25.818 h0.08; Top Component Info "AK30" at 27.587,25.419 h0.08; Top Component Info "AL29" at 27.381,25.019 h0.08; Top Component Info "AK26" at 26.787,25.419 h0.08; Top Component Info "AK28" at 27.187,25.419 h0.08; Top Component Info "AL27" at 26.981,25.019 h0.08; Top Component Info "AL25" at 26.581,25.019 h0.08; Top Component Info "AK22" at 25.987,25.419 h0.08; Top Component Info "AK18" at 25.187,25.419 h0.08; Top Component Info "AK16" at 24.787,25.419 h0.08; Top Component Info "AK14" at 24.387,25.419 h0.08; Top Component Info "AK24" at 26.387,25.419 h0.08; Top Component Info "AK20" at 25.587,25.418 h0.08; Top Component Info "AL23" at 26.181,25.019 h0.08; Top Component Info "AL21" at 25.781,25.019 h0.08; Top Component Info "AL19" at 25.381,25.019 h0.08; Top Component Info "AL17" at 24.981,25.019 h0.08; Top Component Info "AL15" at 24.581,25.019 h0.08; Top Component Info "A13" at 24.223,31.818 h0.08; Top Component Info "B12" at 24.027,31.419 h0.08; Top Component Info "B8" at 23.256,31.419 h0.08; Top Component Info "B10" at 23.627,31.419 h0.08; Top Component Info "B6" at 22.856,31.419 h0.08; Top Component Info "A5" at 22.653,31.819 h0.08; Top Component Info "B4" at 22.456,31.419 h0.08; Top Component Info "B2" at 22.072,31.405 h0.08; Top Component Info "D2" at 21.797,30.818 h0.08; Top Component Info "F2" at 21.797,30.418 h0.08; Top Component Info "H2" at 21.797,30.018 h0.08; Top Component Info "K2" at 21.797,29.618 h0.08; Top Component Info "C1" at 21.456,31.018 h0.08; Top Component Info "E1" at 21.476,30.618 h0.08; Top Component Info "J1" at 21.456,29.818 h0.08; Top Component Info "G1" at 21.456,30.218 h0.08; Top Component Info "M2" at 21.797,29.218 h0.08; Top Component Info "P2" at 21.797,28.818 h0.08; Top Component Info "T2" at 21.797,28.418 h0.08; Top Component Info "V2" at 21.797,28.018 h0.08; Top Component Info "L1" at 21.436,29.418 h0.08; Top Component Info "N1" at 21.476,29.018 h0.08; Top Component Info "R1" at 21.469,28.618 h0.08; Top Component Info "U1" at 21.456,28.218 h0.08; Top Component Info "AK12" at 23.987,25.419 h0.08; Top Component Info "AK8" at 23.217,25.419 h0.08; Top Component Info "AK6" at 22.817,25.419 h0.08; Top Component Info "AK10" at 23.587,25.418 h0.08; Top Component Info "AL13" at 24.181,25.019 h0.08; Top Component Info "AL11" at 23.781,25.019 h0.08; Top Component Info "AL9" at 23.381,25.019 h0.08; Top Component Info "AK4" at 22.417,25.419 h0.08; Top Component Info "AL7" at 23.01,25.019 h0.08; Top Component Info "AL5" at 22.61,25.019 h0.08; Top Component Info "AL3" at 22.21,25.019 h0.08; Top Component Info "Y2" at 21.797,27.618 h0.08; Top Component Info "W1" at 21.456,27.818 h0.08; Top Component Info "AA1" at 21.391,27.418 h0.08; Top Component Info "AB2" at 21.717,27.218 h0.08; Top Component Info "AD2" at 21.717,26.818 h0.08; Top Component Info "AC1" at 21.384,27.018 h0.08; Top Component Info "AK2" at 22.017,25.445 h0.08; Top Component Info "AF2" at 21.717,26.418 h0.08; Top Component Info "AE1" at 21.404,26.618 h0.08; Top Component Info "AH2" at 21.717,26.018 h0.08; Top Component Info "AG1" at 21.384,26.218 h0.08; Top Component Info "AJ1" at 21.384,25.818 h0.08